# Altium PCB Copy of CAN Expansion V1 copy.PcbDoc
Units mm, origin at the board's own origin, x right, y up, seen from the top; angles counter-clockwise.
Board outline 33.5 x 29.6 mm, 2 copper layers (Top Layer, Bottom Layer); 24 components, 25 nets, 121 pads, 0 vias.
Unrouted connection lines stored in the file: 58.
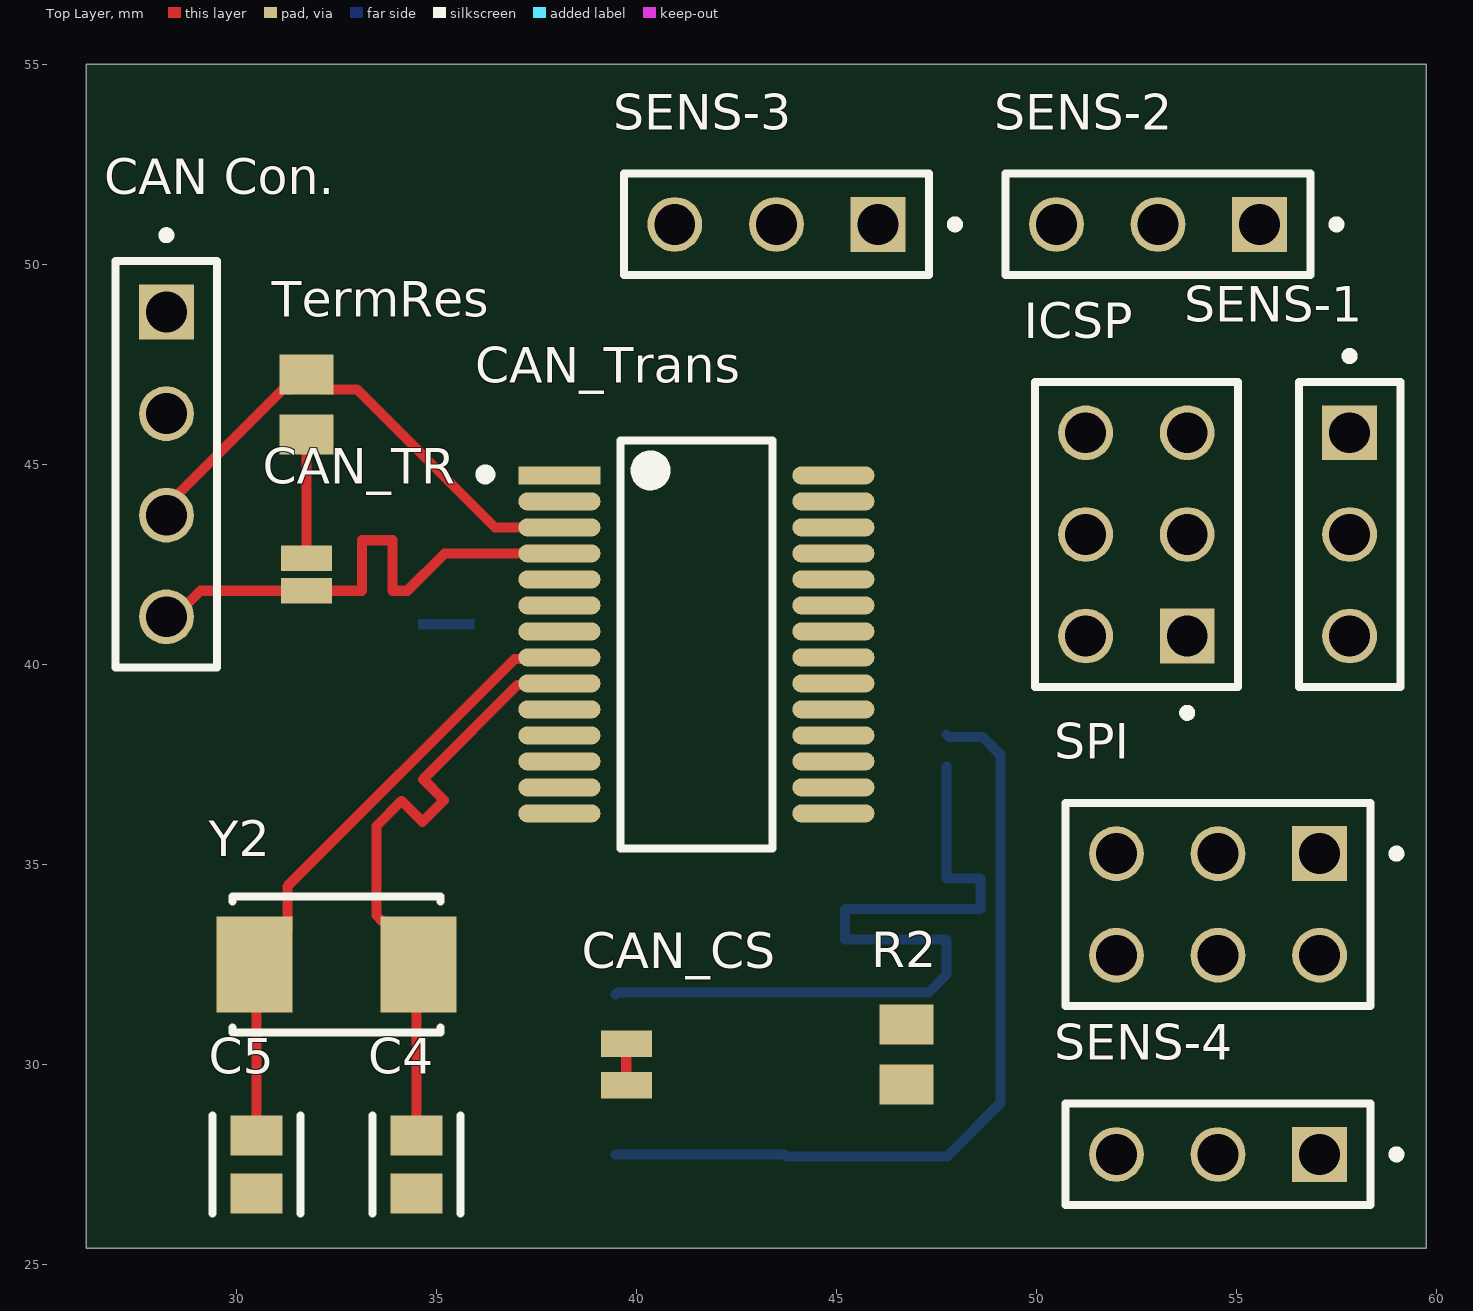
[diagram p0: Top Layer view]
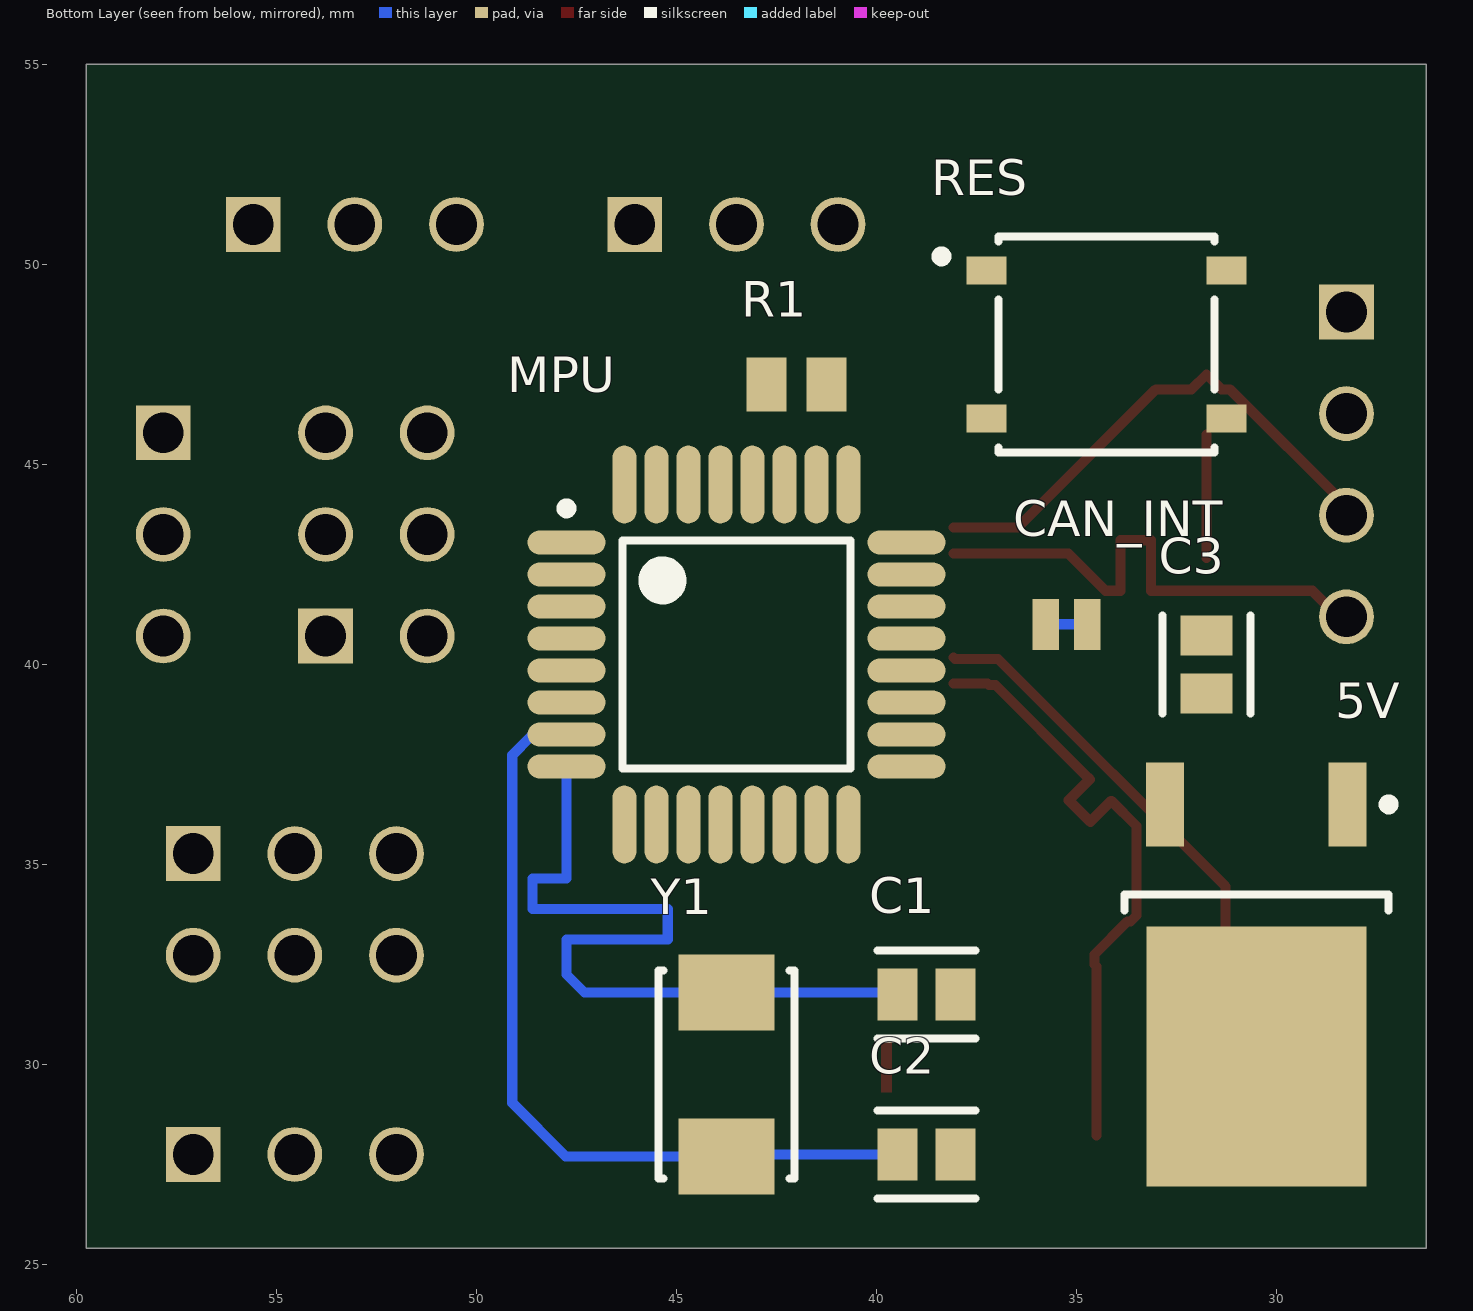
[diagram p1: Bottom Layer view, seen from below]

## Layer stack, top to bottom
Top Solder: solder mask 0.0102, Solder Resist, Dk 3.5
Top Layer: signal copper 0.0356
Dielectric 1: dielectric 0.32, FR-4, Dk 4.8
Bottom Layer: signal copper 0.0356
Bottom Solder: solder mask 0.0102, Solder Resist, Dk 3.5

## Board outline
26.25,25.4 59.75,25.4 59.75,55 26.25,55

## Design rules (kind name [scope] priority, off if disabled: settings)
BoardOutlineClearance [All] p1: gap=0.254 ignorepadtopadclearanceinfootprint=FALSE except(0: Arc-SplitContinuation Track-SplitContinuation SMDPad-SplitContinuation THPad-SplitContinuation Via-SplitContinuation Fill-SplitContinuation Poly-SplitContinuation Region-SplitContinuation Text-SplitContinuation)
Clearance [All] p1: gap=0.254 ignorepadtopadclearanceinfootprint=FALSE except(0: Arc-Hole Track-Hole SMDPad-Hole THPad-Hole Via-Hole Fill-Hole Poly-Hole Region-Hole Text-Hole)
PolygonConnect [All] p1: connectstyle=Relief reliefconductorwidth=0.254 reliefentries=4 polygonreliefangle="90 Angle" airgapwidth=0.254
RoomDefinition "CAN Expansion V1" [InComponentClass('CAN Expansion V1')] p1: confinementstyle=ConfineIn formatcopy=TRUE lockcomponents=FALSE outline 170,30 370,30 370,60 170,60
RoutingVias [All] p1: holewidth=0.711 width=1.27 viastyle="Through Hole" minholewidth=0.711 minwidth=1.27 maxholewidth=0.711 maxwidth=1.27
SolderMaskExpansion [All] p1: expansion=0.102 istentingtop=FALSE
Width [All] p1: maxlimit=1.27 minlimit=0.254 preferedwidth=0.254
30 further rules are at their usual default settings.

## Components (designator, comment, footprint, x,y, rotation, side; value= is the part's Value field where it differs from the comment)
5V "L7805CDT-TR" TO-252_N 30.5,32.25 r270 bottom
C1 "22pf" FP-GRM21B-0_15-IPC_C 38.75,31.75 r180 bottom
C2 "22pf" FP-GRM21B-0_15-IPC_C 38.75,27.75 r180 bottom
C3 ".1uf" FP-GRM21B-0_15-IPC_C 31.75,40 r90 bottom
C4 "27pf" FP-GRM21B-0_15-IPC_C 34.5,27.5 r270 top
C5 "27pf" FP-GRM21B-0_15-IPC_C 30.5,27.5 r270 top
"CAN Con." "TSW-104-07-F-S" SAMTEC_TSW-104-07-F-S 28.25,45 r270 top
CAN_CS "" SMT-JUMPER_2_NC_TRACE_SILK 39.75,30 r90 top
CAN_INT "" SMT-JUMPER_2_NC_TRACE_SILK 35.25,41 r0 bottom
CAN_TR "" SMT-JUMPER_2_NO_SILK 31.75,42.25 r90 top
CAN_Trans "MCP25625T-E/SS" FP-C04-073-IPC_B 41.5,40.5 r0 top
ICSP "TSW-103-07-F-D" SAMTEC_TSW-103-07-F-D 52.5,43.25 r90 top
MPU "ATmega328P-AU" 32A_M 43.5,40.25 r180 bottom
R1 "10k" RESC2013X60X40LL20T25 42,47 r180 bottom
R2 "10k" RESC2013X60X40LL20T25 46.75,30.25 r270 top
RES "PTS526SK15SMTR2LFS" FP-PTS526SK15SMTR2LFS-MFG 34.25,48 r180 bottom
SENS-1 "TSW-103-07-F-S" SAMTEC_TSW-103-07-F-S 57.83,43.25 r270 top
SENS-2 "TSW-103-07-F-S" SAMTEC_TSW-103-07-F-S 53.04,51 r180 top
SENS-3 "TSW-103-07-F-S" SAMTEC_TSW-103-07-F-S 43.5,51 r180 top
SENS-4 "TSW-103-07-F-S" SAMTEC_TSW-103-07-F-S 54.54,27.75 r180 top
SPI "TSW-103-07-F-D" SAMTEC_TSW-103-07-F-D 54.54,34 r180 top
TermRes "120R" RESC2013X60X40LL20T25 31.75,46.5 r270 top
Y1 "ABM3-16.000MHZ-D2Y-T" FP-ABM3-MFG 43.75,29.75 r270 bottom
Y2 "ABM3-8.000MHZ-D2Y-T" FP-ABM3-MFG 32.5,32.5 r0 top

## Footprints (in the part's own frame and the unit in brackets; to place one, negate y for a bottom-side part, rotate by r counter-clockwise, add the part's x,y. Pads: shape width x height; smd on the part's side, far side on the other; paste and mask are expansions set on the pad)
32A_M [mm] "Thin QFP, 32-Leads, Body 7x7mm, Pitch 0.8mm, IPC Low Density"
  oval 1.95x0.6 smd: 1(-4.25,2.8) 2(-4.25,2) 3(-4.25,1.2) 4(-4.25,0.4) 5(-4.25,-0.4) 6(-4.25,-1.2) 7(-4.25,-2) 8(-4.25,-2.8) 17(4.25,-2.8) 18(4.25,-2) 19(4.25,-1.2) 20(4.25,-0.4) 21(4.25,0.4) 22(4.25,1.2) 23(4.25,2) 24(4.25,2.8)
  oval 0.6x1.95 smd: 9(-2.8,-4.25) 10(-2,-4.25) 11(-1.2,-4.25) 12(-0.4,-4.25) 13(0.4,-4.25) 14(1.2,-4.25) 15(2,-4.25) 16(2.8,-4.25) 25(2.8,4.25) 26(2,4.25) 27(1.2,4.25) 28(0.4,4.25) 29(-0.4,4.25) 30(-1.2,4.25) 31(-2,4.25) 32(-2.8,4.25)
  silkscreen extent -4.38,-2.85 2.85,3.77, body extent -3.5,-3.5 3.5,3.5, height 1.2
FP-ABM3-MFG [mm]
  rect 1.9x2.4 smd paste+0 mask+0: 1(-2.05,0) 2(2.05,0)
  silkscreen extent -2.6,-1.7 2.6,1.7, body extent -2.5,-1.6 2.5,1.6, height 1.3
FP-C04-073-IPC_B [mm]
  rect 2.053x0.455 smd paste+0 mask+0: 1(-3.425,4.225)
  rrect100% 2.053x0.455 smd paste+0 mask+0: 2(-3.425,3.575) 3(-3.425,2.925) 4(-3.425,2.275) 5(-3.425,1.625) 6(-3.425,0.975) 7(-3.425,0.325) 8(-3.425,-0.325) 9(-3.425,-0.975) 10(-3.425,-1.625) 11(-3.425,-2.275) 12(-3.425,-2.925) 13(-3.425,-3.575) 14(-3.425,-4.225) 15(3.425,-4.225) 16(3.425,-3.575) 17(3.425,-2.925) 18(3.425,-2.275) 19(3.425,-1.625) 20(3.425,-0.975) 21(3.425,-0.325) 22(3.425,0.325) 23(3.425,0.975) 24(3.425,1.625) 25(3.425,2.275) 26(3.425,2.925) 27(3.425,3.575) 28(3.425,4.225)
  silkscreen extent -5.4,-5.1 1.9,5.1, body extent -4.7,-5.35 4.7,5.35, height 0.25
FP-GRM21B-0_15-IPC_C [mm]
  rect 1.006x1.308 smd paste+0 mask+0: 1(-0.726,0) 2(0.726,0)
  silkscreen extent -1.23,-1.1 1.23,1.1, body extent -1,-0.63 1,0.63, height 1.4
FP-PTS526SK15SMTR2LFS-MFG [mm]
  rect 1x0.7 smd paste+0 mask+0: 1(-3,1.85) 2(3,1.85) 3(-3,-1.85) 4(3,-1.85)
  silkscreen extent -4.25,-2.7 2.7,2.7, body extent -3.2,-2.6 3.2,2.6, height 1.65
RESC2013X60X40LL20T25 [mm] "Chip Resistor, 2-Leads, Body 2.00x1.25mm, IPC High Density"
  rect 1x1.35 smd: 1(-0.75,0) 2(0.75,0)
  body extent -1.1,-0.72 1.1,0.72, height 0.6
SAMTEC_TSW-103-07-F-D [mm]
  rect 1.37x1.37 hole 1.02: 01(-2.54,-1.27)
  round 1.37 hole 1.02: 02(-2.54,1.27) 03(0,-1.27) 04(0,1.27) 05(2.54,-1.27) 06(2.54,1.27)
  silkscreen extent -4.56,-2.54 3.81,2.54
SAMTEC_TSW-103-07-F-S [mm]
  rect 1.37x1.37 hole 1.02: 01(-2.54,0)
  round 1.37 hole 1.02: 02(0,0) 03(2.54,0)
  silkscreen extent -4.56,-1.27 3.81,1.27
SAMTEC_TSW-104-07-F-S [mm]
  rect 1.37x1.37 hole 1.02: 01(-3.81,0)
  round 1.37 hole 1.02: 02(-1.27,0) 03(1.27,0) 04(3.81,0)
  silkscreen extent -5.83,-1.27 5.08,1.27
SMT-JUMPER_2_NC_TRACE_SILK [mil]
  rect 26x50 smd paste+0: 1(-20.5,0) 2(20.5,0)
  Top Layer region: -1,5 27.5,5 27.5,-5 -1,-5 -1,5
  Top Layer region: -27.5,5 1,5 1,-5 -27.5,-5 -27.5,5
SMT-JUMPER_2_NO_SILK [mil]
  rect 25x50 smd paste+0: 1(-16,0) 2(16,0)
TO-252_N [mm] "D-PAK, 4-Leads, Body 6.1x6.5mm, Pitch 2.28mm, Lead Span 9.7mm, IPC Medium Density"
  rect 2.1x0.95 smd: 1(-4.25,2.28) 3(-4.25,-2.28)
  rect 6.5x5.5 smd: 4(2.05,0)
  silkscreen extent -4.37,-3.3 -1.6,3.43, body extent -2,-3.3 4.2,3.3, height 2.4

## Part data
5V: library part CMP-0244-00216-1, "Positive Voltage Regulator, 3-Pin DPAK, Tape and Reel", ComponentLink1Description="Manufacturer URL", ComponentLink1URL=http://www.st.com, ComponentLink2Description=Datasheet, ComponentLink2URL=http://www.st.com/internet/com/TECHNICAL_RESOURCES/TECHNICAL_LITERATURE/DATASHEET/CD00000444.pdf, DatasheetVersion=16/11/2011, PackageDescription="3-Pin Transistor Outline Package 2.28 mm Pitch, 9.7 mm Lead Span (DPAK)", PackageReference=TO-252, PackageVersion=2011
C1 C2 C3 C4 C5: library part CMP-2007-03541-2, "Chip Multilayer Ceramic Capacitors for General Purpose, 0805, 10uF, X5R, 15%, 10%, 25V", Capacitance=10uF, Case Code (Imperial)=0805, Case Code (Metric)=2012, Dielectric=X5R, Max Operating Temperature=85°C, Min Operating Temperature=-55°C, Package Quantity=1, Tolerance=10%, Voltage=25V, Case/Package=0805, Depth=1.25mm, Height=1.25mm, Lead Free="Lead Free", Length=2mm, Material=Ceramic, Mount="Surface Mount", Packaging="Tape and Reel", Radiation Hardening=No, Termination=SMD/SMT, Thickness=0.053inch, Voltage Rating=25V, Voltage Rating (DC)=25V, Width=0.049inch
"CAN Con." ICSP SENS-1 SENS-2 SENS-3 SENS-4 SPI: Package=None, Availability=Unavailable, MF=Samtec, Price=None
  "CAN Con.": MP=TSW-104-07-F-S
  ICSP SPI: MP=TSW-103-07-F-D
  SENS-1 SENS-2 SENS-3 SENS-4: MP=TSW-103-07-F-S
CAN_CS CAN_INT: library part JUMPER-SMT_2_NC_TRACE_SILK, Package=SMT-JUMPER_2_NC_TRACE_SILK, DeviceName=_SILK, DeviceSetName=JUMPER-SMT_2_NC_TRACE, GateName_1=G$1, LibraryName=SparkFun-Jumpers, SymbolName_1=SMT-JUMPER_2_NC_TRACE
CAN_TR: library part JUMPER-SMT_2_NO_SILK, Package=SMT-JUMPER_2_NO_SILK, DeviceName=_SILK, DeviceSetName=JUMPER-SMT_2_NO, GateName_1=G$1, LibraryName=SparkFun-Jumpers, SymbolName_1=SMT-JUMPER_2_NO
CAN_Trans: library part CMP-06279-000016-1, "IC TRANSCEIVER 1/1 28SSOP", Case/Package=SSOP, Max Operating Temperature=125°C, Max Supply Voltage=5.5V, Min Operating Temperature=-40°C, Min Supply Voltage=4.5V, Operating Supply Current=70mA, Package Quantity=2100, Data Rate=1Mbps, Interface=SPI, Mount="Surface Mount", Number of Drivers=1, Number of Pins=28, Number of Receivers=1, Number of Transceivers=1, Packaging="Tape and Reel", Propagation Delay=125ns, Receiver Hysteresis=200mV, RoHS Compliant=Yes, Weight=0.080001oz
MPU: library part CMP-0095-00269-2, "8-bit AVR Microcontroller, 32KB Flash, 1KB EEPROM, 2KB SRAM, 32-pin TQFP, Industrial Grade (-40°C to 85°C)", Code_JEDEC=MS-026-ABA, ComponentLink1Description="Manufacturer URL", ComponentLink1URL=http://www.atmel.com/, ComponentLink2Description="ATmega48A/48PA/88A/88PA/168A/168PA/328/328P Datasheet", ComponentLink2URL=http://www.atmel.com/dyn/resources/prod_documents/doc8271.pdf, ComponentLink3Description="ATmega48A/48PA/88A/88PA/168A/168PA/328/328P Summary", ComponentLink3URL=http://www.atmel.com/dyn/resources/prod_documents/8271S.pdf, DatasheetVersion="revD, May-2011", PackageDescription="32-Lead, 7x7x1.0 mm Body, 0.8mm Lead Pitch, Thin Profile Plastic Quad Flat Package (TQFP)", PackageReference=32A, PackageVersion="revC, Oct-2010", RevisionNote="DatasheetVersion & PackageVersion updated. URLs added."
R1 R2 TermRes: library part CMP-2001-00645-1, Manufacturer=Panasonic, Part Number=ERA6AEB473V
RES: library part CMP-10040-000013-1, "TACT 5.2 X 5.2, 1.5 MM H, 260GF,", Contact Current Rating=50mA, Contact Resistance=100mΩ, Manufacturer=C&K, Operating Force=250gf, Temperature="-20°C to +70°C", Temperature Range High=+70°C, Temperature Range Low=-20°C, Voltage Rating Dc=12V, Automotive=No, Category=Switch, ComponentLink2Description=Datasheet, ComponentLink2URL=https://www.ckswitches.com/media/2780/pts526.pdf, Device Class L1=Electromechanical, Device Class L2=Switches, Device Class L3="Tactile Switches", Digikey Description="TACT 5.2 X 5.2, 1.5 MM H, 260GF,", Electromechanical Life=200000Cycles, Height=1.65mm, Lead Free=Yes, Manufacturer Part Number=PTS526SK15SMTR2LFS, Octopart=https://octopart.com/pts526+sk15+smtr2+lfs-c%26k+components-100617999, Package=PTS526SK15SMTR2LFS, RoHS=TRUE, Standoff Height=0mm, Throw Configuration=SPST-NO
Y1: library part CMP-27762-004490-1, "Crystal 16MHz ±20ppm 18pF SMD-2 5mm x 3.2mm", Case/Package=SMD/SMT, ESR (Equivalent Series Resistance)=40R, Frequency=16MHz, Frequency Stability=30ppm, Frequency Tolerance=20ppm, Load Capacitance=18pF, Max Operating Temperature=85°C, Min Operating Temperature=-40°C, Operating Frequency="16 MHz", Package Quantity=1000, Resistor Type=Ceramic, Height=0.051inch, Lead Free="Lead Free", Length=0.197inch, Mount="Surface Mount", Number of Pins=2, Packaging="Tape and Reel", RoHS Compliant=Yes, Series=ABM3, Series Resistance=40R, Termination=SMD/SMT, Tolerance=20ppm, Width=0.126inch
Y2: library part CMP-2000-05033-2, "Crystal 8MHz ±20ppm 18pF SMD-2 5mm x 3.2mm", Case/Package=CSMD, ESR (Equivalent Series Resistance)=140R, Frequency=8MHz, Frequency Stability=30ppm, Frequency Tolerance=20ppm, Load Capacitance=18pF, Max Operating Temperature=85°C, Min Operating Temperature=-40°C, Package Quantity=1000, Resistor Type=Ceramic, Series Resistance=500R, Depth=3.2mm, Height=0.051inch, Lead Free="Lead Free", Length=5mm, Mount="Surface Mount", Number of Pins=2, Packaging="Tape and Reel", Radiation Hardening=No, RoHS Compliant=Yes, Termination=SMD/SMT, Tolerance=20ppm, Width=3.2mm

## Nets (pads, with @x,y where several pads share a name; then routed paths per layer and width w, separated by ;. In a path a pad name is that pad's centre, name@x,y a point inside that pad or via, vN(x,y) a via of type N, cw(c..) or ccw(c..) an arc to the next point about the centre after c; other vN are vias at no path point)
A0: MPU.23 SENS-1.02
A1: MPU.24 SENS-2.02
A2: MPU.25 SENS-3.02
A3: MPU.26 SENS-4.02
CAN_CS: CAN_CS.2 CAN_Trans.17
CAN_INT: CAN_INT.2 CAN_Trans.13
CAN_MISO: CAN_Trans.16 ICSP.01 MPU.16 SPI.01 SPI.02
CAN_MOSI: CAN_Trans.15 ICSP.04 MPU.15 SPI.03 SPI.04
CAN_RX: CAN_Trans.21 CAN_Trans.28
CAN_SCK: CAN_Trans.14 ICSP.03 MPU.17 SPI.05 SPI.06
CAN_TX: CAN_Trans.20 CAN_Trans.24
CANH: "CAN Con..04" CAN_TR.1 CAN_Trans.4 | length 13
  Top Layer w0.254: 28.25,41.19 28.45,41.19 29.104,41.844 CAN_TR.1 33.012,41.844 33.139,41.844 33.139,43.104 33.901,43.104 33.901,41.844 34.137,41.844 34.274,41.844 35.205,42.775 CAN_Trans.4
CANL: "CAN Con..03" CAN_Trans.3 TermRes.1 | length 13
  Top Layer w0.254: 28.25,43.73 28.25,43.964 31.163,46.877 31.377,46.877 TermRes.1 32.123,46.877 33.015,46.877 36.467,43.425 CAN_Trans.3
CS: CAN_CS.1 MPU.14
D2: CAN_INT.1
GND: 5V.4 "CAN Con..02" C1.2 C2.2 C3.2 C4.2 C5.2 CAN_Trans.10 CAN_Trans.26 ICSP.06 MPU.3 MPU.5 MPU.21 RES.4 SENS-1.01 SENS-2.01 SENS-3.01 SENS-4.01
NetC1_1: C1.1 MPU.8 Y1.1 | length 20.4
  Bottom Layer w0.254: C1.1 39.526,31.8 Y1.1 47.3,31.8 47.75,32.25 47.75,33 47.75,33.127 45.218,33.127 45.218,33.889 48.598,33.889 48.598,34.651 47.75,34.651 47.75,34.85 MPU.8
NetC2_1: C2.1 MPU.7 Y1.2 | length 20.5
  Bottom Layer w0.254: C2.1 43.7,27.75 Y1.2 47.767,27.7 49.106,29.039 49.106,37.732 48.654,38.184 47.816,38.184 MPU.7
NetC4_1: C4.1 CAN_Trans.9 Y2.2 | length 15.8
  Top Layer w0.254: C4.1 34.5,32.45 Y2.2 34.55,32.75 33.727,33.573 33.649,33.573 33.5,33.722 33.5,35.96 34.129,36.588 34.652,36.065 35.191,36.604 34.667,37.127 34.798,37.257 37.024,39.483 37.18,39.483 37.222,39.525 CAN_Trans.9
NetC5_1: C5.1 CAN_Trans.8 Y2.1 | length 15.8
  Top Layer w0.254: C5.1 30.5,32.45 Y2.1 31.273,33.323 31.273,34.451 36.959,40.137 38.036,40.137 CAN_Trans.8
NetCAN_TR_2: CAN_TR.2 TermRes.2 | length 3.1
  Top Layer w0.254: CAN_TR.2 TermRes.2
NetCAN_Trans_18: CAN_Trans.18 R2.1
"PWR IN": 5V.1 "CAN Con..01"
RESET: ICSP.05 MPU.29 R1.1 RES.2
VCC: 5V.3 C3.1 CAN_Trans.1 CAN_Trans.19 CAN_Trans.27 ICSP.02 MPU.4 MPU.6 MPU.18 MPU.20 R1.2 R2.2 SENS-1.03 SENS-2.03 SENS-3.03 SENS-4.03
pads on no net: CAN_Trans.2 CAN_Trans.5 CAN_Trans.6 CAN_Trans.7 CAN_Trans.11 CAN_Trans.12 CAN_Trans.22 CAN_Trans.23 CAN_Trans.25 MPU.1 MPU.2 MPU.9 MPU.10 MPU.11 MPU.12 MPU.13 MPU.19 MPU.22 MPU.27 MPU.28 MPU.30 MPU.31 MPU.32 RES.1 RES.3